# EAGLE board finalsch (EAGLE 7.6.0)
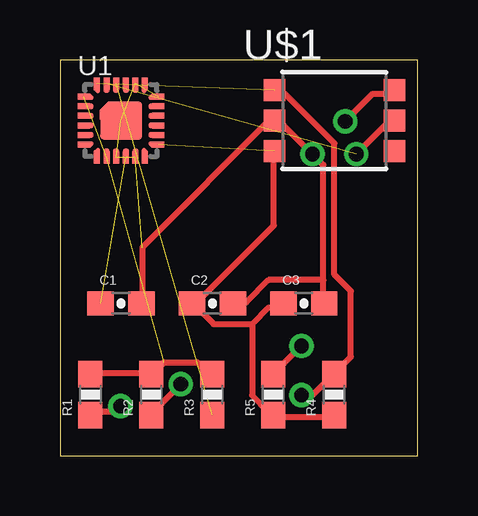
[diagram p0: board, top side]
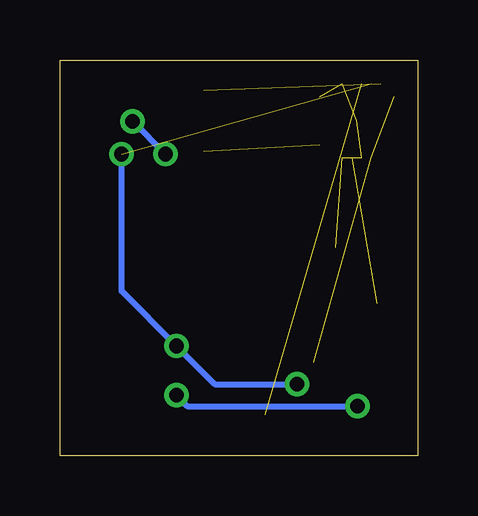
[diagram p1: board, bottom side, seen from below]

Size 14.91 x 16.5 mm. Coordinates in mm from the lower left corner, seen from the top.
Outline: 0,0 14.91,0 14.91,16.5 0,16.5 0,0
Copper layers (1*16): Top 0.035mm / dielectric 1.5mm / Bottom 0.035mm
Design rules "default": minimum track width 10mil, minimum drill 24mil, track to track 8mil, track to pad 8mil, pad to pad 8mil, via to via 8mil, smd to smd 8mil, copper to edge 40mil, drill to drill 8mil, minimum pad ring 10mil, minimum via ring 8mil, stop-mask expansion 4mil, vias tented up to drill 0mil, thermal gap 10mil

## Footprints (pad centres in the part's own frame; a part is rotated, then mirrored left to right if it is on the bottom)
0603-CAP = smd 1.1 x 1: 1 -0.85,0; 2 0.85,0
0603-RES = smd 1.1 x 1: 1 -0.85,0; 2 0.85,0
QFN24_PAD = smd 0.5 x 0.25: 1 -1.55,1; 2 -1.55,0.6; 3 -1.55,0.2; 4 -1.55,-0.2; 5 -1.55,-0.6; 6 -1.55,-1; 13 1.55,-1; 14 1.55,-0.6; 15 1.55,-0.2; 16 1.55,0.2; 17 1.55,0.6; 18 1.55,1 | smd 0.08 x 0.13: 1$1 -1.32,1.06; 1$3 -1.26,0.94; P$33 1.26,-0.94; P$34 1.32,-1.06; P$58 1.26,0.94; P$59 1.32,1.06; P$68 -1.26,-0.94; P$69 -1.32,-1.06 | smd 0.1 x 0.185 rotated 45: 1$2 -1.25,1.024; P$49 1.024,-1.25 | smd 0.14 x 0.14: 1$4 -1.22,0.945; P$23 -0.945,-1.22; P$24 1.22,-0.945; P$36 0.945,1.22; P$51 0.945,-1.22; P$56 1.22,0.945; P$61 -0.945,1.22; P$66 -1.22,-0.945 | smd 0.05 x 0.05: 1$5 -1.175,0.97; P$25 -0.97,-1.175; P$31 1.175,-0.97; P$37 0.97,1.175; P$52 0.97,-1.175; P$57 1.175,0.97; P$62 -0.97,1.175; P$67 -1.175,-0.97 | smd 0.25 x 0.5: 7 -1,-1.55; 8 -0.6,-1.55; 9 -0.2,-1.55; 10 0.2,-1.55; 11 0.6,-1.55; 12 1,-1.55; 19 1,1.55; 20 0.6,1.55; 21 0.2,1.55; 22 -0.2,1.55; 23 -0.6,1.55; 24 -1,1.55 | smd 0.25 x 0.25: CENTER 0,0 | smd 0.4 x 0.4: DBBADFE -0.675,0.24 | smd 0.6 x 1.2: DBBADFE1 -0.575,-0.195 | smd 0.25 x 0.3: P$1 -0.2,1.3; P$3 0.2,1.3; P$5 0.6,1.3; P$11 -0.6,1.3; P$16 0.2,-1.3; P$18 -0.2,-1.3; P$20 -0.6,-1.3; P$26 0.6,-1.3 | smd 0.3 x 0.25: P$2 -1.3,0.2; P$4 -1.3,0.6; P$28 -1.3,-0.2; P$38 -1.3,-0.6; P$40 1.3,0.2; P$42 1.3,-0.2; P$44 1.3,-0.6; P$50 1.3,0.6 | smd 0.1 x 0.185 rotated 225: P$7 1.25,-1.024; P$60 -1.024,1.25 | smd 1.1 x 1.59: P$13 0.325,0 | smd 0.3 x 0.5 rotated 315: P$14 -0.592,0.512 | smd 0.5 x 1.59: P$15 -0.27,0 | smd 0.1 x 0.185 rotated 135: P$22 -1.024,-1.25; P$55 1.25,1.024 | smd 0.13 x 0.08: P$27 -0.94,-1.26; P$29 -1.06,-1.32; P$39 0.94,1.26; P$41 1.06,1.32; P$53 0.94,-1.26; P$54 1.06,-1.32; P$63 -0.94,1.26; P$64 -1.06,1.32 | smd 0.1 x 0.185 rotated 315: P$35 1.024,1.25; P$65 -1.25,-1.024
MS5806-02BA = smd 0.9 x 0.9: P$1 -2.5,1.27; P$2 -2.5,0; P$3 -2.5,-1.27; P$4 2.5,1.27; P$5 2.5,0; P$6 2.5,-1.27

## Placement (x,y rotation side)
C1  0.1uF  [0603-CAP]  2.54,6.35 0 top
C2  0.1uF  [0603-CAP]  6.35,6.35 0 top
C3  100 nF  [0603-CAP]  10.16,6.35 0 top
R1  10K  [0603-RES]  1.27,2.54 90 top
R2  10K  [0603-RES]  3.81,2.54 90 top
R3  10K  [0603-RES]  6.35,2.54 90 top
R4  10K  [0603-RES]  11.43,2.54 90 top
R5  10K  [0603-RES]  8.89,2.54 90 top
U1  MPU-9250  [QFN24_PAD]  2.54,13.97 0 top
U$1  MS580602BA52-51'A'  [MS5806-02BA]  11.43,13.97 0 top

## Library data of the parts
C1-C3 = SparkFun-Capacitors; PROD_ID: CAP-00810
R1-R5 = SparkFun-Resistors; PROD_ID: RES-00824
U1 = Testing; PROD_ID: IC-13192
U$1 = myLibrary

## Nets
CS: R3.1 U1.22
GND: C1.2 C2.2 C3.2 U1.9 U1.11 U1.18 U1.20 U1.CENTER U$1.P$2 U$1.P$4
INT: U1.12
REGOUT: C1.1 U1.10
SCL/SCLK: R2.1 R5.2 U1.23 U$1.P$5
SDA/SDI: R1.1 R4.2 U1.24 U$1.P$1
VDD: C2.1 C3.1 R4.1 R5.1 U1.13 U$1.P$3
VDDIO: R1.2 R2.2 R3.2 U1.1 U1.8

## Tracks (layer width: path | path; a pad name or v marks a point on that pad's centre or on a via)
CS  (1 unrouted)
GND  (via drill 0.61)  (5 unrouted)
  Top 0.254: 10.97,7.32 10.97,6.4 C3.2 | 10.97,7.32 10.97,12.12 v10.52,12.57 9.14,13.95 U$1.P$2 8.91,14.17 3.43,8.69 3.43,6.4 C1.2 | v11.89,13.95 13.03,15.09 13.72,15.09 U$1.P$4 | 10.97,7.32 8.69,7.32 7.77,6.4 7.32,6.4 C2.2
  Bottom 0.254: v10.52,12.57 v11.89,13.95
REGOUT  (1 unrouted)
SCL/SCLK  (via drill 0.61)  (1 unrouted)
  Top 0.254: v12.34,12.57 13.72,13.95 U$1.P$5 | v10.06,4.57 8.91,3.43 R5.2 | v5.03,2.97 3.89,1.83 R2.1
  Bottom 0.254: v12.34,12.57 12.34,6.86 v10.06,4.57 8.46,2.97 v5.03,2.97
SDA/SDI  (via drill 0.61)  (1 unrouted)
  Top 0.254: 11.43,3.43 12.12,4.12 12.12,6.86 11.43,7.54 11.43,13.03 9.37,15.09 9.14,15.09 U$1.P$1 | v2.52,2.06 2.29,1.83 1.37,1.83 R1.1 | v10.06,2.52 10.52,2.52 11.43,3.43 | 11.43,3.43 R4.2
  Bottom 0.254: v2.52,2.06 9.6,2.06 v10.06,2.52
VDD  (1 unrouted)
  Top 0.254: R4.1 11.43,1.6 8.91,1.6 R5.1 8.69,1.83 8,2.52 8,5.49 | U$1.P$3 8.91,12.57 8.91,9.6 5.71,6.4 C2.1 5.71,6.17 6.4,5.49 8,5.49 | 8,5.49 8.69,6.17 9.14,6.17 C3.1
VDDIO  (2 unrouted)
  Top 0.254: R1.2 1.37,3.43 3.66,3.43 R2.2 3.89,3.43 4.34,3.89 5.71,3.89 6.17,3.43 R3.2